# EAGLE board itrope-serial-v04 (EAGLE 7.4.0)
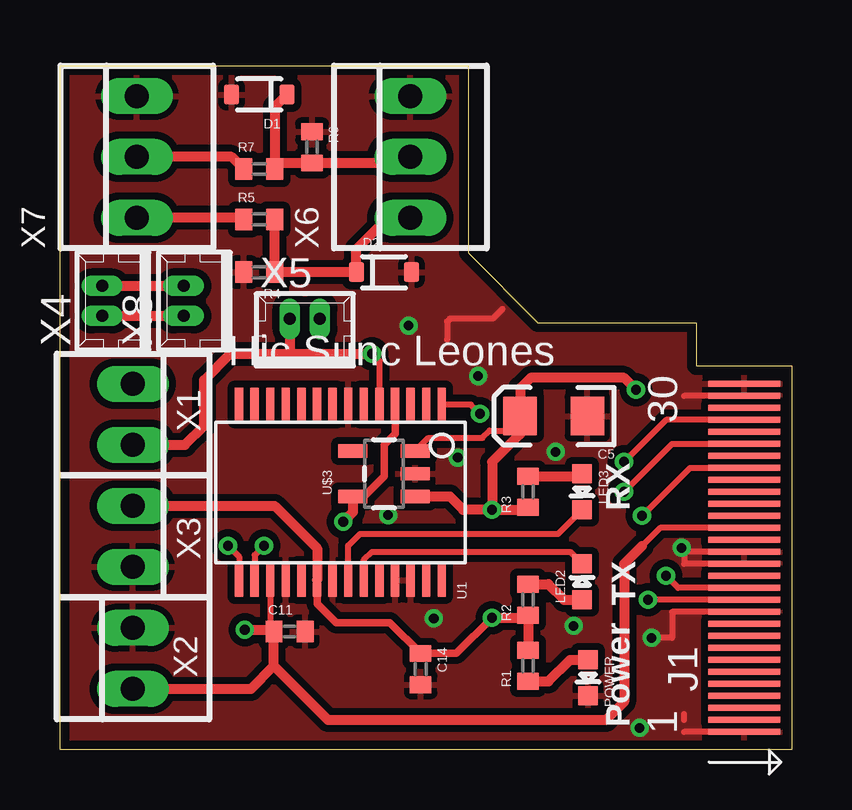
[diagram p0: board, top side]
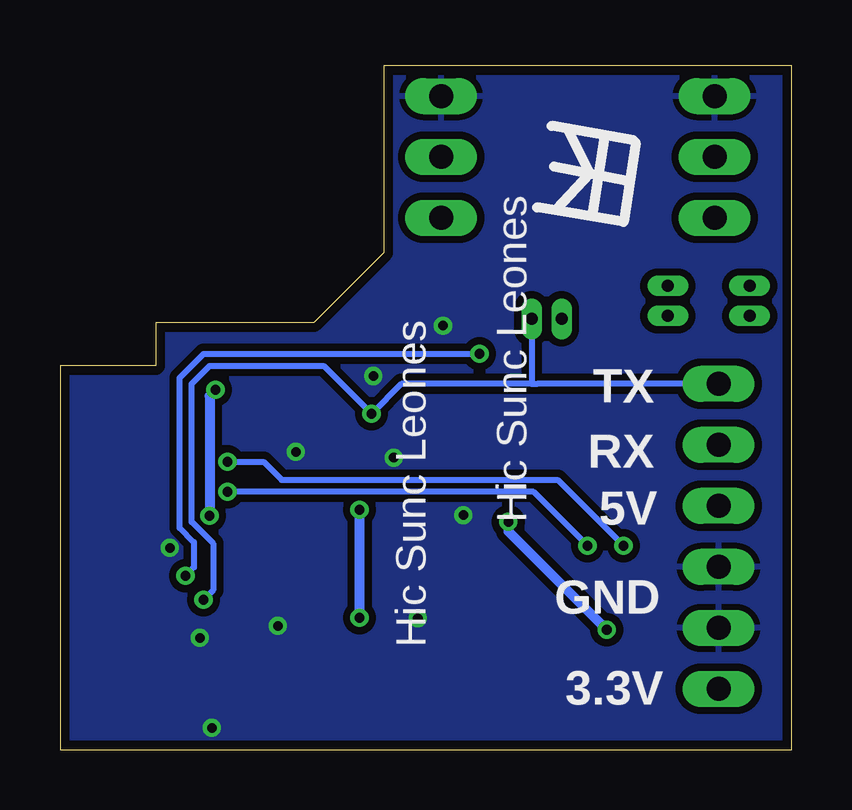
[diagram p1: board, bottom side, seen from below]

Size 30.48 x 28.5 mm. Coordinates in mm from the lower left corner, seen from the top.
Outline: 0,28.5 17,28.5 17,20.7 19.9,17.8 26.5,17.8 26.5,16 30.48,16 30.48,0 0,0 0,28.5
Copper layers (1*16): Top 0.0356mm / dielectric 1.5011mm / Bottom 0.0356mm
Design rules "LaenPCBOrder": minimum track width 6mil, minimum drill 13mil, track to track 6mil, track to pad 6mil, pad to pad 6mil, via to via 6mil, smd to smd 6mil, copper to edge 15mil, drill to drill 6mil, minimum pad ring 7mil, minimum via ring 7mil, stop-mask expansion 3mil, vias tented up to drill 0mil, thermal gap 10mil
Net classes: 1 vcc: width 0.203 mm

## Footprints (pad centres in the part's own frame; a part is rotated, then mirrored left to right if it is on the bottom)
EIA3216 = smd 1.4 x 1.6: A 1.4,0; C -1.4,0
C0402 = smd 0.7 x 0.9: 1 -0.65,0; 2 0.65,0
SOD-323 = smd 0.63 x 0.83: 1 -1.15,0; 2 1.15,0
30PINEDGE = smd 0.25 x 3: P$1 7.25,1.5; P$2 6.75,1.5; P$3 6.25,1.5; P$4 5.75,1.5; P$5 5.25,1.5; P$6 4.75,1.5; P$7 4.25,1.5; P$8 3.75,1.5; P$9 3.25,1.5; P$10 2.75,1.5; P$11 2.25,1.5; P$12 1.75,1.5; P$13 1.25,1.5; P$14 0.75,1.5; P$15 0.25,1.5; P$16 -0.25,1.5; P$17 -0.75,1.5; P$18 -1.25,1.5; P$19 -1.75,1.5; P$20 -2.25,1.5; P$21 -2.75,1.5; P$22 -3.25,1.5; P$23 -3.75,1.5; P$24 -4.25,1.5; P$25 -4.75,1.5; P$26 -5.25,1.5; P$27 -5.75,1.5; P$28 -6.25,1.5; P$29 -6.75,1.5; P$30 -7.25,1.5
LED-0603 = smd 0.8 x 0.8: A 0,-0.75; C 0,0.75
SSOP28DB = smd 0.348 x 1.397: 1 -4.225,-3.656; 2 -3.575,-3.656; 3 -2.925,-3.656; 4 -2.275,-3.656; 5 -1.625,-3.656; 6 -0.975,-3.656; 7 -0.325,-3.656; 8 0.325,-3.656; 9 0.975,-3.656; 10 1.625,-3.656; 11 2.275,-3.656; 12 2.925,-3.656; 13 3.575,-3.656; 14 4.225,-3.656; 15 4.225,3.656; 16 3.575,3.656; 17 2.925,3.656; 18 2.275,3.656; 19 1.625,3.656; 20 0.975,3.656; 21 0.325,3.656; 22 -0.325,3.656; 23 -0.975,3.656; 24 -1.625,3.656; 25 -2.275,3.656; 26 -2.925,3.656; 27 -3.575,3.656; 28 -4.225,3.656
SOT23-5 = smd 0.55 x 1.2: 1 -0.95,-1.3; 2 0,-1.3; 3 0.95,-1.3; 4 0.95,1.3; 5 -0.95,1.3
22-23-2021 = drill 1 long: 1 -1.27,0; 2 1.27,0
53047-02 = drill 0.5 pad 0.698 long: 1 0.625,0.45; 2 -0.625,0.45
22-23-2031 = drill 1 long: 1 -2.54,0; 2 0,0; 3 2.54,0

## Placement (x,y rotation side)
C5  10uF  [EIA3216]  20.57,13.9 180 top
C11  0.1uF  [C0402]  9.57,4.93 0 top
C14  0.1uF  [C0402]  15.03,3.36 270 top
D1  [SOD-323]  8.3,27.3 180 top
D2  [SOD-323]  13.5,19.9 0 top
J1  JAE-IPOD-EDGECARD  [30PINEDGE]  27,8 270 top
LED2  Red  [LED-0603]  21.75,7 0 top
LED3  Green  [LED-0603]  21.75,10.75 180 top
POWER  Red  [LED-0603]  22,3 180 top
R1  330  [C0402]  19.5,3.5 90 top
R2  1K  [C0402]  19.5,6.25 90 top
R3  1K  [C0402]  19.5,10.75 90 top
R4  10k  [C0402]  8.3,19.9 180 top
R5  33k  [C0402]  8.3,22.1 0 top
R6  10k  [C0402]  10.5,25.1 270 top
R7  33k  [C0402]  8.3,24.2 0 top
U1  FT232RL-BASICSSOP  [SSOP28DB]  11.68,10.72 180 top
U$3  V_REG_SOT23-5_EN  [SOT23-5]  13.5,11.5 90 top
U$9  CREATIVE_COMMONS  [CREATIVE_COMMONS]  -9.18,-27.14 0 top  (outside the outline)
X1  22-23-2021  [22-23-2021]  3.04,13.97 270 top
X2  22-23-2021  [22-23-2021]  3.04,3.81 90 top
X3  22-23-2021  [22-23-2021]  3.04,8.89 270 top
X4  53047-02  [53047-02]  2.2,18.7 90 top
X5  53047-02  [53047-02]  10.2,17.5 0 top
X6  22-23-2031  [22-23-2031]  14.6,24.7 90 top
X7  22-23-2031  [22-23-2031]  3.2,24.7 90 top
X8  53047-02  [53047-02]  5.6,18.7 90 top

## Library data of the parts
C5 C11 C14 LED2 LED3 POWER R1-R7 U1 U$9 = SparkFun
D1 D2 U$3 = LITTLEBITS
J1 = con-jae-IPOD-edgecard
X1-X3 = con-molex; MF: MOLEX; MPN: 22-23-2021; OC_FARNELL: 1462926; OC_NEWARK: 25C3832
X4 X5 X8 = con-molex; MF: MOLEX; MPN: 53047-0210; OC_FARNELL: 9733051; OC_NEWARK: 57H4701
X6 X7 = con-molex; MF: MOLEX; MPN: 22-23-2031; OC_FARNELL: 1462950; OC_NEWARK: 30C0862

## Nets
5V [vcc]: C5.A C14.1 J1.P$23 R1.2 R2.1 R3.1 U1.20 U$3.1 U$3.3 X3.1
+3V3: C11.1 J1.P$18 U1.4 U1.17 U$3.5 X2.1
D+: J1.P$27 U1.15
D-: J1.P$25 U1.16
GND [vcc]: C5.C C11.2 C14.2 D1.2 D2.2 J1.P$1 J1.P$11 J1.P$15 J1.P$16 J1.P$29 J1.P$30 POWER.C R4.2 R6.1 U1.7 U1.18 U1.21 U1.25 U1.26 U$3.2 X2.2 X3.2 X6.3 X7.3
LEFT: D1.1 R6.2 R7.2 X6.2
N$1: POWER.A R1.1
N$2: R7.1 X7.2
N$3: LED2.A R2.2
N$4: LED3.A R3.2
N$5: R5.1 X7.1
N$6: X4.2 X8.2
N$8: X4.1 X8.1
RIGHT: D2.1 R4.1 R5.2 X6.1
RXD: J1.P$13 U1.5 X1.2 X5.2
RXLED: LED3.C U1.22
TXD: J1.P$12 U1.1 X1.1 X5.1
TXLED: LED2.C U1.23

## Tracks (layer width: path | path; a pad name or v marks a point on that pad's centre or on a via)
5V  (via drill 0.4)
  Top 0.254: 19.3,10.09 R3.1 | 19.17,13.13 C5.A 18.57,13.3 17.9,13.3 17.6,13 15.35,13 U$3.3 | v24.25,9.75 26.25,11.75 J1.P$23
  Top 0.305: U1.20 10.71,6.09 11.5,5.3 13.74,5.3 C14.1 16.51,4.01 v18,5.5
  Top 0.406: v24,15 23.5,15.5 19.61,15.5 19.17,15.07 C5.A | 19.35,4 R1.2 R2.1 19.4,5.5 v18,5.5 | v18,10 19.4,10 R3.1 | 19.17,13.13 19.13,13.13 18,12 v18,10 | v18,10 16.8,10 16.25,10.55 U$3.1 | X3.1 8.94,10.16 10.71,8.39 U1.20
  Bottom 0.406: v18,5.5 v18,10 | v24,15 24.25,14.75 v24.25,9.75
+3V3  (via drill 0.4)
  Top 0.254: U1.17 8.76,5.08 C11.1 | J1.P$18 25,9.25 24.25,8.5
  Top 0.305: U$3.5 12.65,10.55 13.5,11.4 13.5,12.7 13.96,13.16 U1.4
  Top 0.406: X2.1 7.96,2.54 8.92,3.5 | 8.92,3.5 C11.1 8.84,5 v7.7,5 | 8.92,3.5 11.16,1.25 22.75,1.25 23.5,2 23.5,7.75 24.25,8.5 | U$3.5 12.2,9.9 v11.8,9.5
  Bottom 0.406: v11.8,9.5 11.8,9.1 v7.7,5
D+  (via drill 0.4)
  Top 0.254: v7,8.5 7.46,8.04 U1.15 | J1.P$27 25.25,13.75 v23.5,12
  Bottom 0.254: v23.5,12 22,12 21.25,11.25 9.75,11.25 v7,8.5
D-  (via drill 0.4)
  Top 0.254: v8.5,8.5 8.11,8.11 U1.16 | v23.5,10.75 25.5,12.75 J1.P$25
  Bottom 0.254: v23.5,10.75 10.75,10.75 v8.5,8.5
GND  (via drill 0.4)
  Top 0.254: 16.13,17.09 16.13,17.84 16.26,17.96 18.03,17.96 18.43,18.36 | 12.06,14.32 U1.7 | 26,1.25 26,1.5 | J1.P$29 26,14.75 | J1.P$16 26,8.25 26,7.75 J1.P$15 | J1.P$11 25.5,5.75 25.5,4.66 v24.65,4.66 | J1.P$1 26,0.75
  other vias: 14.52,17.67 24.15,0.91 20.65,12.41 21.4,5.16 25.9,8.41 15.57,5.47 16.57,12.17 13.67,9.77 17.42,15.57
  pour Top (isolate 0.3): 0,0 0,28.4 17.05,28.45 17.05,22.55 19.9,19.7 26.5,19.7 26.5,16.1 30.48,16.1 30.48,0
  pour Bottom (isolate 0.305): 0,0 0,28.4 17,28.5 17,22.6 19.9,19.7 26.5,19.7 26.5,16.1 30.48,16.1 30.48,0
LEFT
  Top 0.406: X6.2 14.35,24.45 R6.2 9.2,24.45 R7.2 8.95,26.8 D1.1
N$1
  Top 0.254: POWER.A 21.84,3.87 21.73,3.75
  Top 0.406: R1.1 20.35,2.85 21.25,3.75 POWER.A
N$2
  Top 0.406: R7.1 7.15,24.7 X7.2
N$3
  Top 0.406: R2.2 20.35,6.9 21,6.25 LED2.A
N$4
  Top 0.406: R3.2 21.65,11.4 LED3.A
N$5
  Top 0.406: R5.1 7.59,22.16 X7.1
N$6
  Top 0.406: X4.2 X8.2
N$8
  Top 0.406: X4.1 X8.1
RIGHT
  Top 0.406: X6.1 14.54,22.1 13.6,22.1 12.35,20.85 D2.1 R4.1 R5.2
RXD  (via drill 0.4)
  Top 0.254: v13,16.5 13.31,16.19 U1.5 | J1.P$13 25.75,6.75 v25.25,7.25
  Top 0.406: X1.2 5.2,12.7 6,13.5 6,15.4 7.1,16.5 9.7,16.5 | 9.7,16.5 v13,16.5 | X5.2 9.57,16.62 9.7,16.5
  Bottom 0.254: v13,16.5 24.5,16.5 25.5,15.5 25.5,9.25 24.9,8.65 24.9,7.6 v25.25,7.25
RXLED
  Top 0.254: U1.22 12.01,8.51 12.5,9 20.75,9 LED3.C
TXD  (via drill 0.4)
  Top 0.254: v17.5,14 17.12,14.38 U1.1 | J1.P$12 v24.5,6.25
  Bottom 0.254: X1.1 10.6,15.24 10.82,15.24 | 10.82,15.24 16.26,15.24 v17.5,14 19.5,16 24.25,16 25,15.25 25,9.5 24.1,8.6 24.1,6.65 v24.5,6.25 | X5.1 10.82,15.24
TXLED
  Top 0.254: U1.23 12.66,7.91 13,8.25 21.25,8.25 LED2.C

## Text on the board
tPlace: Hic Sunc Leones | RX | TX | Power
bPlace: Hic Sunc Leones | Hic Sunc Leones | TX | RX | 5V | GND | 3.3V
Measures: R | L